# Altium PCB PCB1.PcbDoc
Units mm, origin at the board's own origin, x right, y up, seen from the top; angles counter-clockwise.
Board outline 25.28 x 82.05 mm, 2 copper layers (Top Layer, Bottom Layer); 7 components, 20 nets, 84 pads, 0 vias.
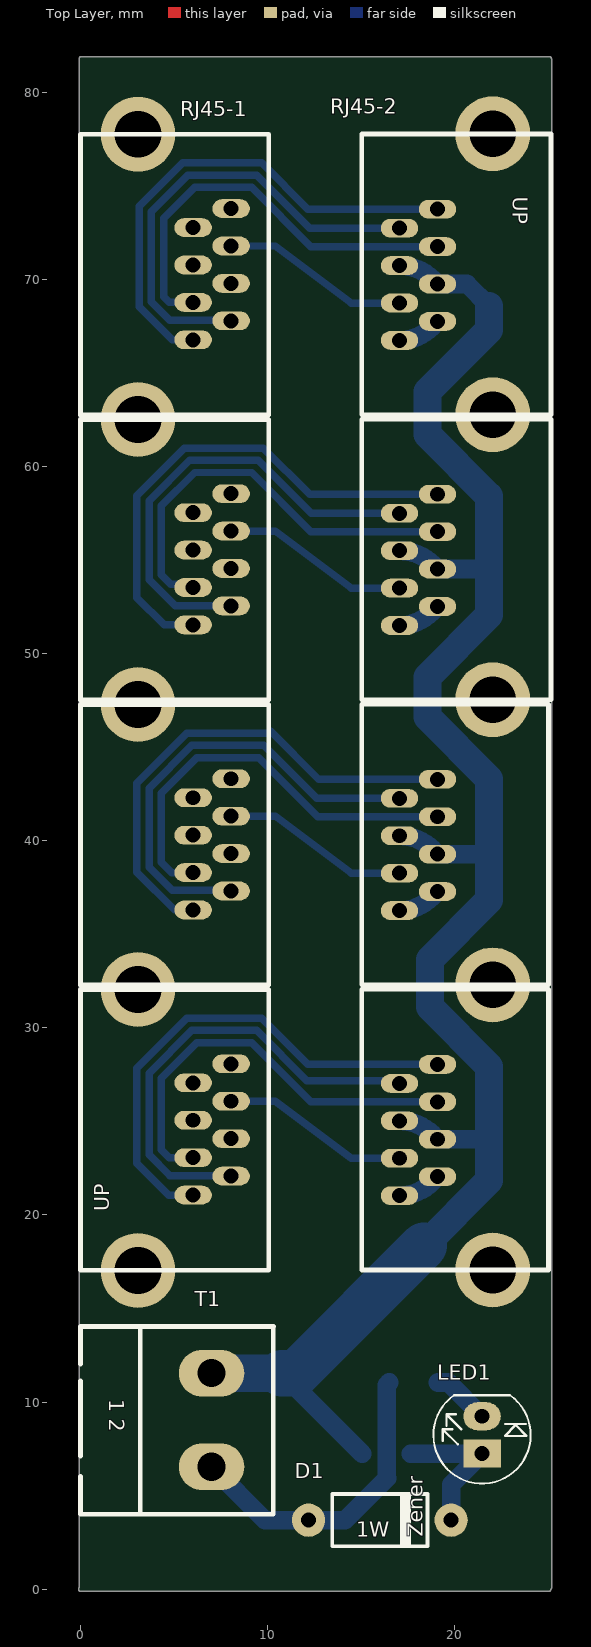
[diagram p0: Top Layer view]
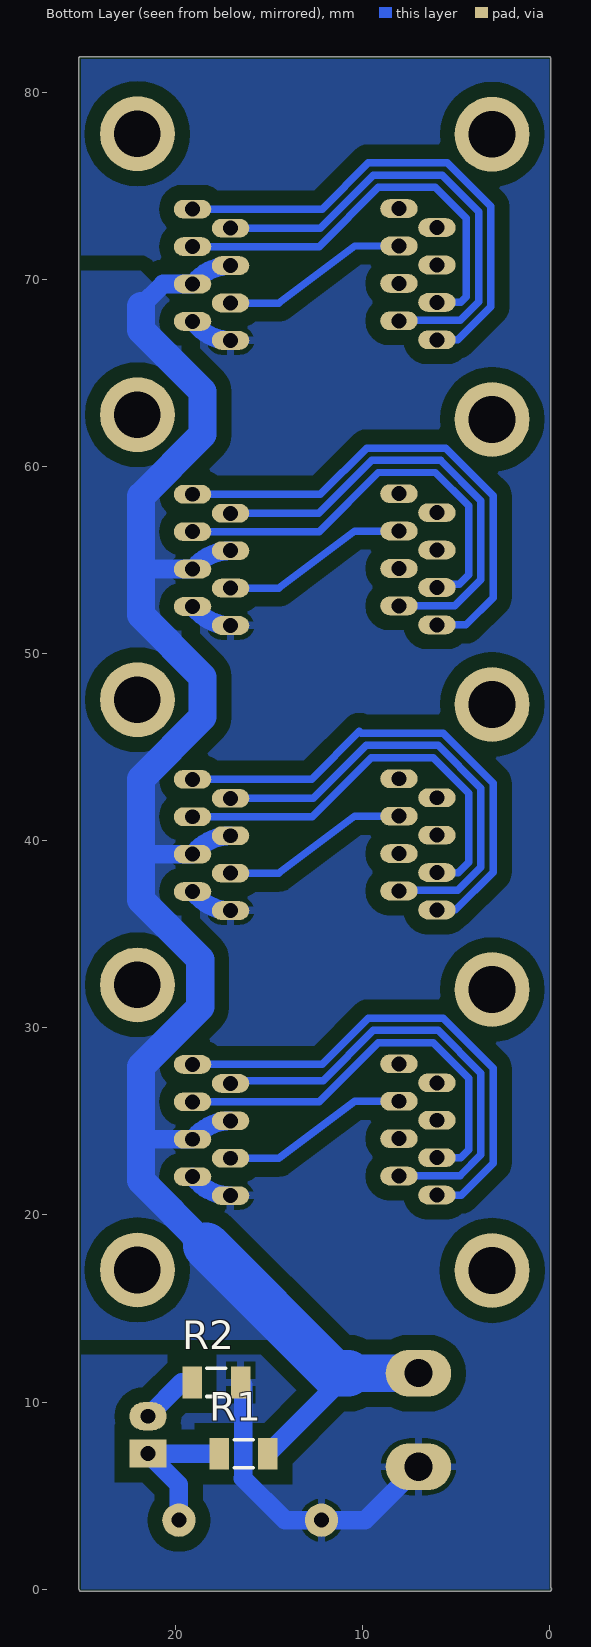
[diagram p1: Bottom Layer view, seen from below]

## Layer stack, top to bottom
Top Solder: solder mask 0.0102, Solder Resist, Dk 3.5
Top Layer: signal copper 0.0356
Dielectric 1: dielectric 0.32, FR-4, Dk 4.8
Bottom Layer: signal copper 0.0356
Bottom Solder: solder mask 0.0102, Solder Resist, Dk 3.5

## Board outline
0.019,-0.127 cw(c0.019,0) -0.078,0.082 -0.078,81.8 cw(c0.049,81.8) 0.049,81.927 25.049,81.927 cw(c25.049,81.8) 25.176,81.8 25.176,0.063 cw(c25.049,0.063) 25.145,-0.021 cw(c25.019,0) 25.019,-0.127

## Design rules (kind name [scope] priority, off if disabled: settings)
Clearance [All] p1: gap=0.25 ignorepadtopadclearanceinfootprint=FALSE
PolygonConnect [All] p1: connectstyle=Relief reliefconductorwidth=0.4 reliefentries=4 polygonreliefangle="90 Angle" airgapwidth=0.254
RoutingVias [All] p1: holewidth=0.711 width=1.27 viastyle="Through Hole" minholewidth=0.711 minwidth=1.27 maxholewidth=0.711 maxwidth=1.27
SolderMaskExpansion [All] p1: expansion=0.102
Width [All] p1: maxlimit=3 minlimit=0.254 preferedwidth=1.5
30 further rules are at their usual default settings.

## Components (designator, comment, footprint, x,y, rotation, side; value= is the part's Value field where it differs from the comment)
D1 "Diode Zener" "Diode 1W" 16.002,3.683 r0 top
LED1 "Red" LED-5mm 21.463,7.239 r90 top
R1 "330R" "RES 1206 (3216X08L)" 15.057,7.239 r0 bottom
R2 "330R" "RES 1206 (3216X08L)" 16.51,11.049 r0 bottom
RJ45-1 "" rj45-w57-4 8.05,22.079 r90 top
RJ45-2 "" rj45-w57-4 17.048,72.751 r270 top
T1 "Phoenix terminal" "phoenix terminal 2" -4.68,14.033 r270 top

## Footprints (in the part's own frame and the unit in brackets; to place one, negate y for a bottom-side part, rotate by r counter-clockwise, add the part's x,y. Pads: shape width x height; smd on the part's side, far side on the other; paste and mask are expansions set on the pad)
"Diode 1W" [mil]
  round 70 hole 31.5: 1(-150,0) 2(150,0)
  silkscreen extent -100,-55 100,55, body extent -166,-52 165,52, height 131
LED-5mm [mm]
  rect 1.5x2 hole 0.8: 1(0,0)
  oval 1.5x2 hole 0.8: 2(2,0)
  silkscreen extent -1.6,-2.6 3.13,2.6
"phoenix terminal 2" [mm] "2 terminals"
  oval 2.5x3.5 hole 1.5: 1(2.493,11.684) 2(7.493,11.684)
  silkscreen extent 0,4.68 10.03,15
"RES 1206 (3216X08L)" [mm] "Chip Resistor, 2-Leads, Body 3.2x1.6mm, IPC High Density _ (0.125 W)"
  rect 1.05x1.7 smd: 1(0,0) 2(2.596,0)
  silkscreen extent 0.8,-0.75 1.8,0.75, body extent -0.23,-0.76 2.82,0.76, height 0.6
rj45-w57-4 [mm]
  oval 1x2 hole 0.8: 1(-1.016,2.032) 2(0,0) 3(0.984,2.032) 4(2,0) 5(2.984,2.032) 6(4,0) 7(4.984,2.032) 8(6,0) 9(14.224,2.032) 10(15.24,0) 11(16.224,2.032) 12(17.24,0) 13(18.224,2.032) 14(19.24,0) 15(20.224,2.032) 16(21.24,0) 17(29.464,2.032) 18(30.48,0) 19(31.464,2.032) 20(32.48,0) 21(33.464,2.032) 22(34.48,0) 23(35.464,2.032) 24(36.48,0) 25(44.704,2.032) 26(45.72,0) 27(46.704,2.032) 28(47.72,0) 29(48.704,2.032) 30(49.72,0) 31(50.704,2.032) 32(51.72,0)
  round 4 hole 2.5: 33(-5.046,4.983) 34(9.97,4.983) 35(25.21,4.983) 36(40.45,4.983) 37(55.69,4.983)
  silkscreen extent -5.03,-2.02 55.69,8.05

## Part data
D1: "Zener Diode", Voltage=12V, Company=E.P.I.L, Design Date=2011/11/02, Designer="Saeid Jorablo"
LED1: library part LED, "LED", Adding Date=1387/12/22, Color=Red, Designer="Saeid Jorablo", Organazation=ControTec, Size="SMD 1206"
R1 R2: library part Resistor, "Resistor", Power="1/8 W", Tolerance=5%
RJ45-1 RJ45-2: library part RJ45-w57-4
T1: library part "Phoenix terminal 2", "Terminal 2 Pin", ComponentLinkURL=www.picpars.com, Designer="Seyed Mohsen Ghasemain", E-mail=picpars@gmail.com

## Nets (pads, with @x,y where several pads share a name; then routed paths per layer and width w, separated by ;. In a path a pad name is that pad's centre, name@x,y a point inside that pad or via, vN(x,y) a via of type N, cw(c..) or ccw(c..) an arc to the next point about the centre after c; other vN are vias at no path point)
GND: D1.1 R2.1 RJ45-2.7 RJ45-2.8 RJ45-2.15 RJ45-2.16 RJ45-2.23 RJ45-2.24 RJ45-2.31 RJ45-2.32 T1.2 | length 26.1
  Bottom Layer w1: T1.2 9.861,3.683 D1.1 14.134,3.683 16.383,5.932 16.374,5.941 16.374,10.913 R2.1 ; RJ45-2.32 ccw(c17.048,23.484) 18.782,21.749 RJ45-2.31 ; RJ45-2.24 ccw(c17.048,38.724) 18.782,36.989 RJ45-2.23 ; RJ45-2.16 ccw(c17.048,53.964) 18.782,52.229 RJ45-2.15 ; RJ45-2.8 ccw(c17.048,69.204) 18.782,67.469 RJ45-2.7
NetD1_2: D1.2 LED1.1 R1.2 | length 8
  Bottom Layer w1: R1.2 LED1.1 19.812,5.588 D1.2
NetLED1_2: LED1.2 R2.2 | length 3.1
  Bottom Layer w1: R2.2 19.653,11.049 LED1.2
RX+p1: RJ45-1.27 RJ45-2.3 | length 22.5
  Bottom Layer w0.4: RJ45-1.27 4.75,68.783 4.445,69.088 4.445,73.279 6.096,74.93 9.144,74.93 12.307,71.767 RJ45-2.3
RX+p2: RJ45-1.19 RJ45-2.11 | length 22.5
  Bottom Layer w0.4: RJ45-1.19 5.84,53.721 4.826,53.721 4.318,54.229 4.318,57.912 6.096,59.69 9.144,59.69 12.307,56.527 RJ45-2.11
RX+p3: RJ45-1.11 RJ45-2.19 | length 22.5
  Bottom Layer w0.4: RJ45-1.11 4.877,38.303 4.318,38.862 4.318,42.545 6.223,44.45 9.525,44.45 12.688,41.287 RJ45-2.19
RX+p4: RJ45-1.3 RJ45-2.27 | length 22.6
  Bottom Layer w0.4: RJ45-1.3 4.75,23.063 4.318,23.495 4.318,27.305 6.223,29.21 9.144,29.21 12.307,26.047 RJ45-2.27
RX-p1: RJ45-1.30 RJ45-2.6 | length 10
  Bottom Layer w0.4: RJ45-1.30 10.414,71.799 14.478,68.751 RJ45-2.6
RX-p2: RJ45-1.22 RJ45-2.14 | length 10
  Bottom Layer w0.4: RJ45-1.22 10.414,56.559 14.478,53.511 RJ45-2.14
RX-p3: RJ45-1.14 RJ45-2.22 | length 10
  Bottom Layer w0.4: RJ45-1.14 10.414,41.319 14.478,38.271 RJ45-2.22
RX-p4: RJ45-1.6 RJ45-2.30 | length 10
  Bottom Layer w0.4: RJ45-1.6 10.414,26.079 14.478,23.031 RJ45-2.30
TX+p1: RJ45-1.25 RJ45-2.1 | length 26.9
  Bottom Layer w0.4: RJ45-1.25 4.9,66.783 3.137,68.546 3.137,73.912 5.463,76.238 9.686,76.238 12.157,73.767 RJ45-2.1
TX+p2: RJ45-1.17 RJ45-2.9 | length 27.2
  Bottom Layer w0.4: RJ45-1.17 4.464,51.543 3.01,52.997 3.01,58.454 5.554,60.998 9.777,60.998 12.248,58.527 RJ45-2.9
TX+p3: RJ45-1.9 RJ45-2.17 | length 26.9
  Bottom Layer w0.4: RJ45-1.9 5.027,36.303 3.01,38.32 3.01,43.087 5.681,45.758 10.071,45.758 10.16,45.847 12.72,43.287 RJ45-2.17
TX+p4: RJ45-1.1 RJ45-2.25 | length 27
  Bottom Layer w0.4: RJ45-1.1 4.718,21.063 3.01,22.771 3.01,27.847 5.681,30.518 9.686,30.518 12.157,28.047 RJ45-2.25
TX-p1: RJ45-1.26 RJ45-2.2 | length 24.1
  Bottom Layer w0.4: RJ45-1.26@7.467,67.829 4.779,67.829 3.791,68.817 3.791,73.641 5.734,75.584 9.415,75.584 12.248,72.751 RJ45-2.2
TX-p2: RJ45-1.18 RJ45-2.10 | length 24.6
  Bottom Layer w0.4: RJ45-1.18 5.063,52.559 3.664,53.958 3.664,58.183 5.825,60.344 9.506,60.344 12.339,57.511 RJ45-2.10
TX-p3: RJ45-1.10 RJ45-2.18 | length 24.6
  Bottom Layer w0.4: RJ45-1.10 8.02,37.349 4.906,37.349 3.664,38.591 3.664,42.816 5.952,45.104 9.796,45.104 12.629,42.271 RJ45-2.18
TX-p4: RJ45-1.2 RJ45-2.26 | length 24.7
  Bottom Layer w0.4: RJ45-1.2 8.02,22.109 4.779,22.109 3.664,23.224 3.664,27.576 5.952,29.864 9.415,29.864 12.101,27.178 16.901,27.178 RJ45-2.26
VCC: R1.1 RJ45-2.4 RJ45-2.5 RJ45-2.12 RJ45-2.13 RJ45-2.20 RJ45-2.21 RJ45-2.28 RJ45-2.29 T1.1 | length 101
  Bottom Layer w1: 10.756,11.54 R1.1 ; RJ45-2.28 cw(c17.048,22.501) RJ45-2.29@18.837,24.29 ; RJ45-2.20 cw(c17.048,37.741) RJ45-2.21@18.837,39.53 ; RJ45-2.12 cw(c17.048,52.981) RJ45-2.13@18.837,54.77 ; RJ45-2.4 cw(c17.048,68.221) RJ45-2.5@18.837,70.01 ; RJ45-2.29@18.837,24.29 RJ45-2.29 21.8,24.047 21.844,24.003 ; RJ45-2.21@18.837,39.53 RJ45-2.21 21.673,39.287 21.844,39.116 ; RJ45-2.13@18.837,54.77 RJ45-2.13 21.761,54.527 21.844,54.61 ; RJ45-2.5@18.837,70.01 RJ45-2.5 20.657,69.767 21.844,68.58
  Bottom Layer w1.5: 18.352,18.351 21.844,21.844 21.844,24.003 21.844,27.94 18.669,31.115 18.669,33.655 21.844,36.83 21.844,39.116 21.844,43.307 18.542,46.609 18.542,48.768 21.844,52.07 21.844,54.61 21.844,58.42 18.542,61.722 18.542,64.008 21.844,67.31 21.844,68.58
  Bottom Layer w2: T1.1 10.756,11.54
  Bottom Layer w2.5: 10.756,11.54 11.54,11.54 18.352,18.351
pads on no net: RJ45-1.4 RJ45-1.5 RJ45-1.7 RJ45-1.8 RJ45-1.12 RJ45-1.13 RJ45-1.15 RJ45-1.16 RJ45-1.20 RJ45-1.21 RJ45-1.23 RJ45-1.24 RJ45-1.28 RJ45-1.29 RJ45-1.31 RJ45-1.32 RJ45-1.33 RJ45-1.34 RJ45-1.35 RJ45-1.36 RJ45-1.37 RJ45-2.33 RJ45-2.34 RJ45-2.35 RJ45-2.36 RJ45-2.37

## Polygon pours and split planes (outlines as drawn)
VCC on Bottom Layer "Top Layer-No Net" (solid, remove dead copper, pour order 0): 25.019,13.335 11.904,13.335 17.653,19.177 19.685,19.685 19.685,68.326 21.844,70.485 25.019,70.485
GND on Bottom Layer "Top Layer-No Net" (solid, remove dead copper, pour order 2): 0,81.788 25.019,81.788 25.019,71.12 21.971,71.12 18.542,67.691 18.669,67.564 18.669,12.7 25.019,12.7 25.019,0 0,0

## Silkscreen, mask and mechanical layers (free items; w line width, h text height)
Mechanical 1:
  lines w0.254: 0.019,0 25.019,0 ; 0.049,0.063 0.049,81.8 25.049,81.8 25.049,0.063

## Text inside footprints (layer, text, board x,y; h text height)
D1: Top Overlay "Zener" at 18.288,2.794 h0.8 r90; Top Overlay "1W" at 14.732,2.794 h0.8
RJ45-1: Top Overlay "UP" at 1.524,20.193 h0.8 r90
RJ45-2: Top Overlay "UP" at 23.114,74.422 h0.8 r270
T1: Top Overlay "1 2" at 1.524,10.16 h0.8 r270